# EAGLE board piezo-preamp-tickler_V0-4 (EAGLE 7.5.0)
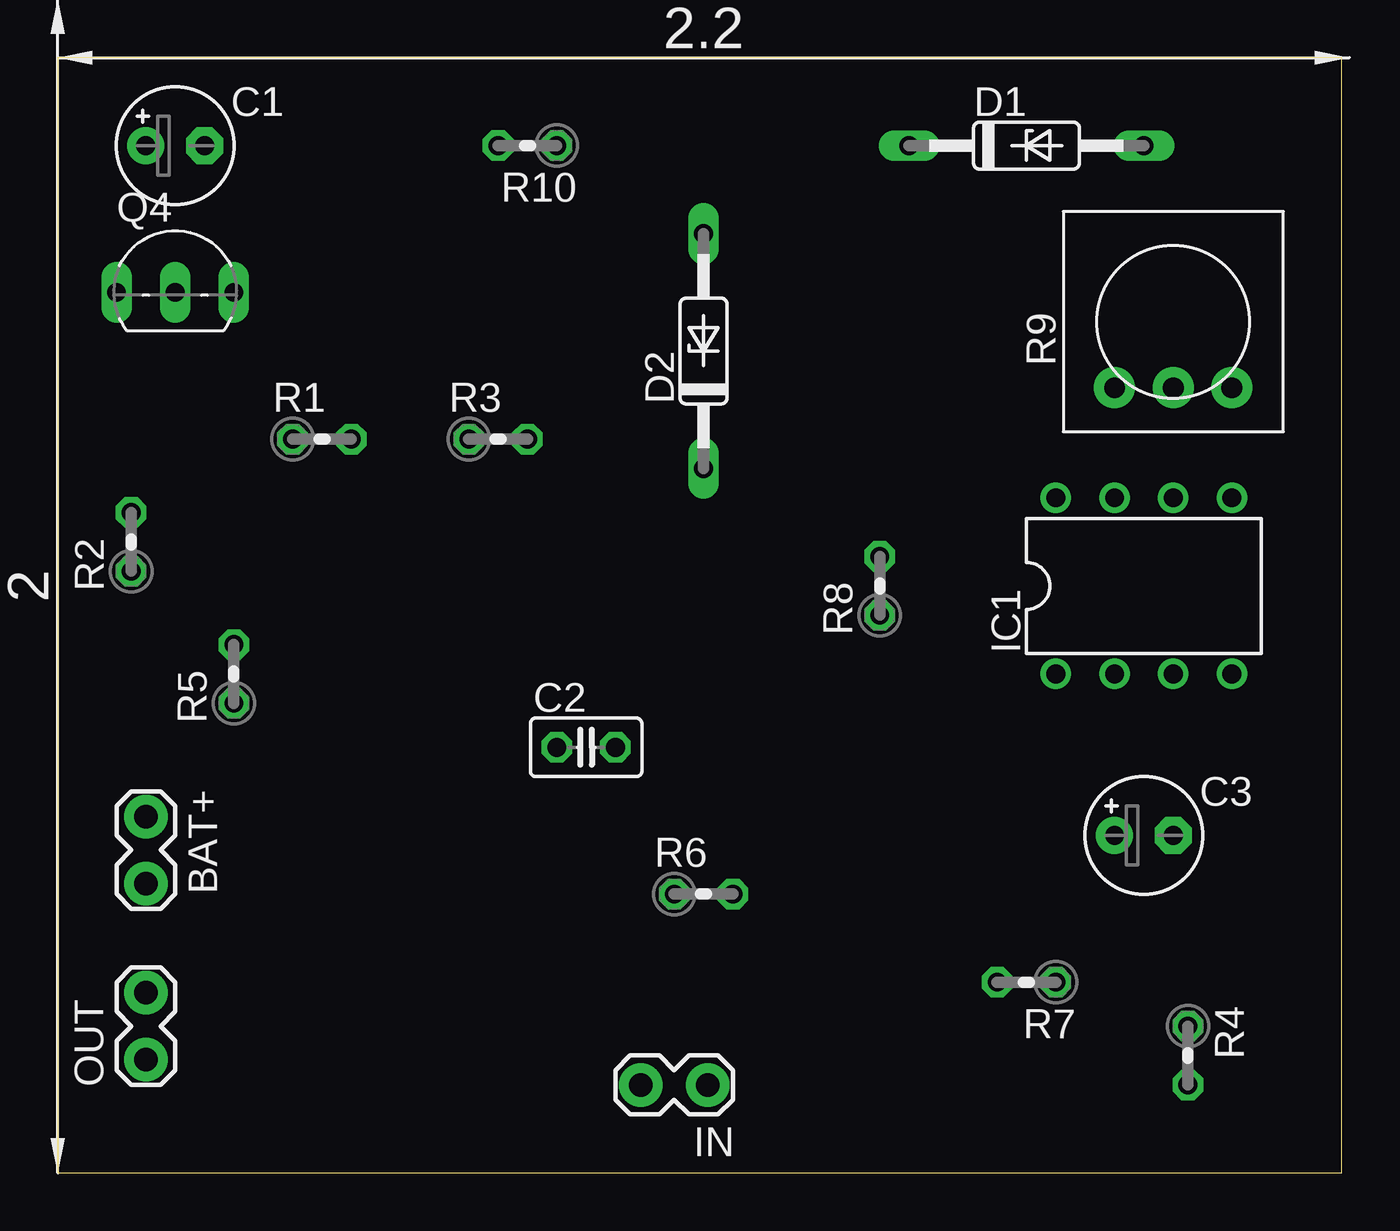
[diagram p0: board, top side]
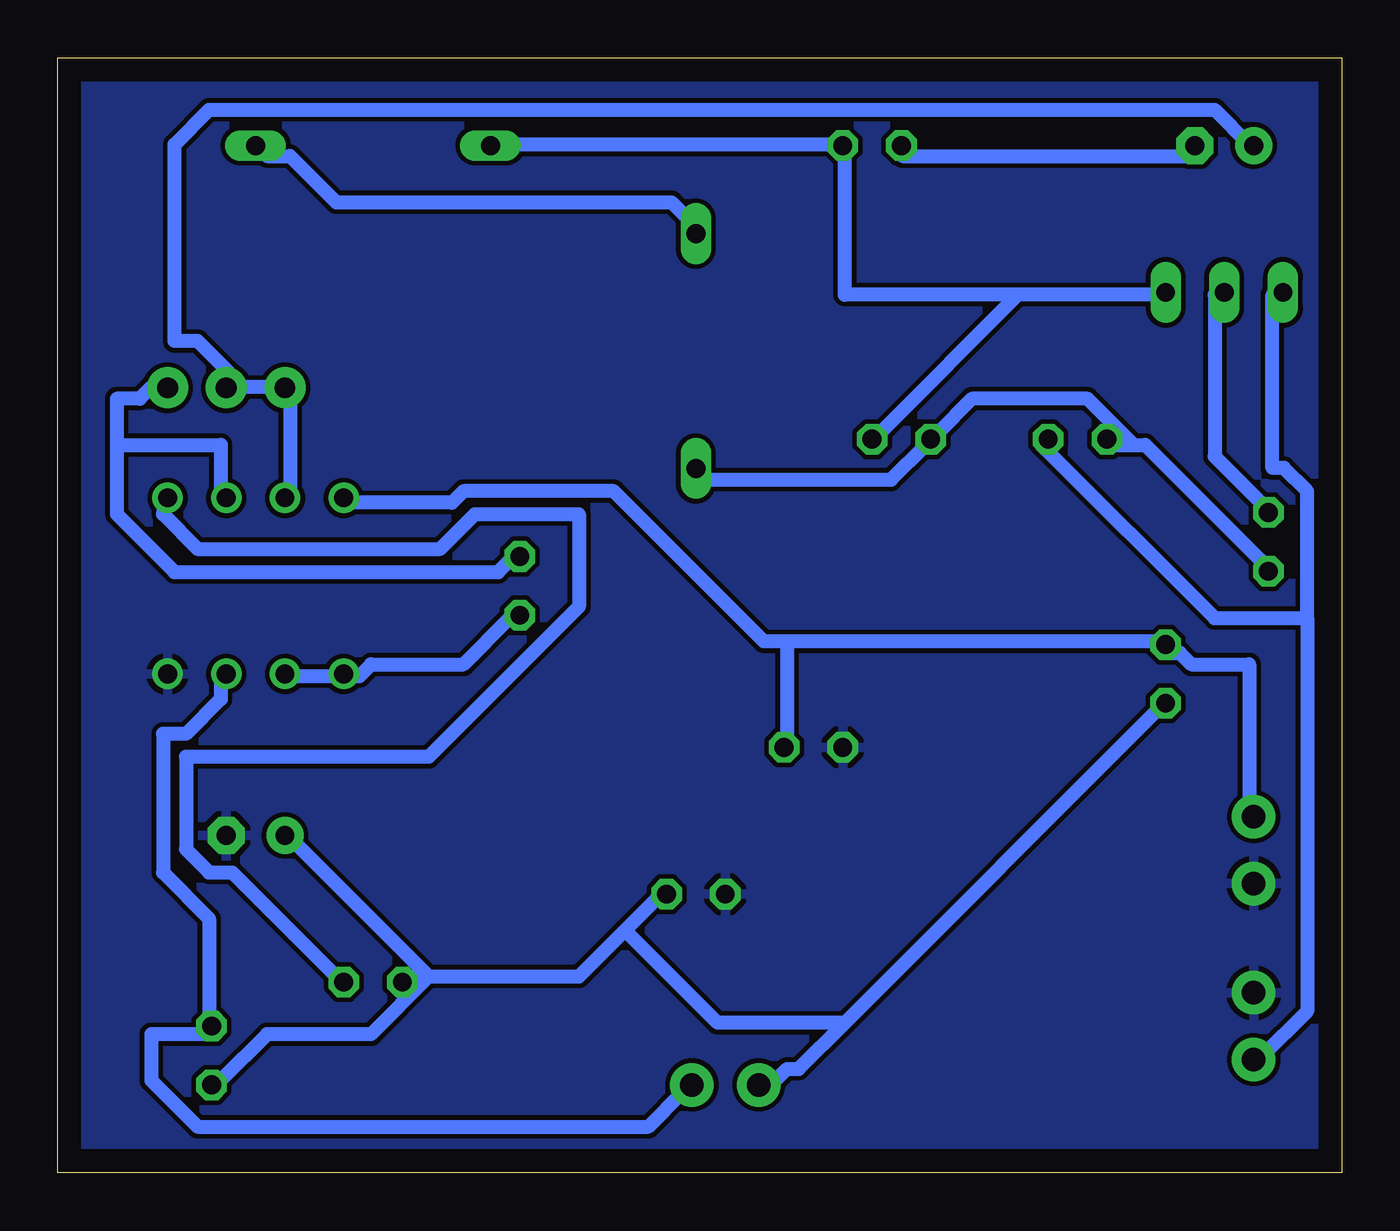
[diagram p1: board, bottom side, seen from below]

Size 55.55 x 48.25 mm. Coordinates in mm from the lower left corner, seen from the top.
Outline: 0,0 55.55,0 55.55,48.25 0,48.25 0,0
Copper layers (1*16): Top 0.035mm / dielectric 1.5mm / Bottom 0.035mm
Design rules "default *": minimum track width 10mil, minimum drill 24mil, track to track 8mil, track to pad 8mil, pad to pad 8mil, via to via 8mil, smd to smd 8mil, copper to edge 40mil, drill to drill 8mil, minimum pad ring 10mil, minimum via ring 8mil, stop-mask expansion 4mil, vias tented up to drill 0mil, thermal gap 10mil
Net classes: 0 default: width 0.6 mm, clearance 0.2 mm

## Footprints (pad centres in the part's own frame; a part is rotated, then mirrored left to right if it is on the bottom)
1X02_LOCK = drill 1.016 pad 1.88: 1 -0.178,0; 2 2.718,0
E2,5-5 = drill 0.813 pad 1.6: + -1.27,0 | drill 0.813 pad 1.6 octagon: - 1.27,0
C025-025X050 = drill 0.813 octagon: 1 -1.27,0; 2 1.27,0
DO35Z10 = drill 0.813 long: A 5.08,0; C -5.08,0
DIL08 = drill 0.813 pad 1.27: 1 -3.81,-3.81; 2 -1.27,-3.81; 3 1.27,-3.81; 4 3.81,-3.81; 5 3.81,3.81; 6 1.27,3.81; 7 -1.27,3.81; 8 -3.81,3.81
TO92- = drill 0.813 long: 1 2.54,0; 2 0,0; 3 -2.54,0
0204V = drill 0.813 octagon: 1 -1.27,0; 2 1.27,0
TRIM-3386 = drill 0.9 pad 1.778: 1 -2.54,-2.857; 2 0,-2.857; 3 2.54,-2.857

## Placement (x,y rotation side)
BAT+  [1X02_LOCK]  3.81,15.24 270 top
C1  10u  [E2,5-5]  5.08,44.45 0 top
C2  100n  [C025-025X050]  22.86,18.41 0 top
C3  10u  [E2,5-5]  46.99,14.61 0 top
D1  [DO35Z10]  41.91,44.45 0 top
D2  [DO35Z10]  27.94,35.56 90 top
IC1  TLC272  [DIL08]  46.99,25.4 0 top
IN  [1X02_LOCK]  27.94,3.81 180 top
OUT  [1X02_LOCK]  3.81,5.08 90 top
Q4  2N5484  [TO92-]  5.08,38.1 0 top
R1  10K  [0204V]  11.43,31.75 0 top
R2  1.2K  [0204V]  3.17,27.3 90 top
R3  1M  [0204V]  19.05,31.75 0 top
R4  10k..10m  [0204V]  48.9,5.08 270 top
R5  150K  [0204V]  7.62,21.59 90 top
R6  100K  [0204V]  27.94,12.06 0 top
R7  1K  [0204V]  41.91,8.26 180 top
R8  1K  [0204V]  35.56,25.4 90 top
R9  [TRIM-3386]  48.26,36.83 0 top
R10  1K  [0204V]  20.32,44.45 180 top

## Library data of the parts
BAT+ OUT = CMU-ArtFab
C1-C3 = rcl
D1 D2 = diode
IC1 = linear
IN = SparkFun-Connectors
Q4 = transistor-fet
R1-R8 R10 = resistor
R9 = adafruit

## Nets
GND: BAT+.2 C2.1 C3.- IC1.4 OUT.2 R6.1
N$1: D1.A D2.A
N$2: OUT.1 Q4.3 R1.2
N$3: Q4.2 R2.2
N$5: IC1.5 R7.1
N$6: C1.+ IC1.7 R9.1 R9.2
N$7: IC1.6 R8.2 R9.3
N$8: C3.+ IN.2 R4.2 R5.1 R6.2 R7.2
N$9: IC1.3 IN.1 R4.1
N$10: D1.C Q4.1 R3.2 R10.1
N$11: C1.- R10.2
N$14: IC1.1 IC1.2 R8.1
R3: D2.C R1.1 R2.1 R3.1
V9V: BAT+.1 C2.2 IC1.8 R5.2

## Tracks (layer width: path | path; a pad name or v marks a point on that pad's centre or on a via)
GND
  pour Bottom: 0,48.26 55.88,48.26 55.88,0 0,0
N$1
  Bottom 0.6: D2.A 28,41 29,42 43.5,42 45.5,44 46.5,44 D1.A
N$2
  Bottom 0.6: 1.5,24 1.5,29.5 2.5,30.5 3,30.5 3,38 Q4.3 | 1.5,24 5.5,24 13,31.5 R1.2 | 1.5,24 1.5,7 3.5,5 OUT.1
N$3
  Bottom 0.6: R2.2 3.5,29 5.5,31 5.5,38 Q4.2
N$5
  Bottom 0.6: R7.1 43.5,8.5 48,13 49,13 50,14 50,18 39.5,18 33,24.5 33,28.5 37.5,28.5 39,27 49.5,27 51,28.5 51,29 IC1.5
N$6
  Bottom 0.6: 47.5,34 49.5,36 50.5,36 50.5,44.5 49,46 5.5,46 4,44.5 C1.+ | 47.5,34 46,34 R9.1 45.5,33.5 45.5,29.5 IC1.7 | 47.5,34 48,34 R9.2
N$7
  Bottom 0.6: 53,31.5 53,33.5 52,33.5 51.5,34 51,34 R9.3 | 53,31.5 53,28.5 50.5,26 36.5,26 36,26.5 R8.2 | 53,31.5 48.5,31.5 48.5,29.5 IC1.6
N$8
  Bottom 0.6: 31,10.5 33,8.5 39.5,8.5 | 31,10.5 29.5,12 R6.2 | 39.5,8.5 40.5,8.5 R7.2 | 39.5,8.5 42,6 46.5,6 48.5,4 R4.2 | 39.5,8.5 45.5,14.5 C3.+ | 21.5,6.5 23.5,4.5 24,4.5 24.5,4 25,4 IN.2 | 21.5,6.5 8,20 R5.1 | 31,10.5 27,6.5 21.5,6.5
N$9
  Bottom 0.6: IC1.3 48.5,21.5 48.5,20.5 50,19 51,19 51,13 49,11 49,6.5 R4.1 49,6 51.5,6 51.5,4 49.5,2 30,2 28.5,3.5 IN.1
N$10
  Bottom 0.6: 14,38 20,32 R3.2 | 14,38 8,38 Q4.1 | 14,38 21.5,38 21.5,44 R10.1 22,44.5 36.5,44.5 D1.C
N$11
  Bottom 0.6: C1.- 6.5,44 19,44 R10.2
N$14
  Bottom 0.6: IC1.2 45.5,21.5 43.5,21.5 IC1.1 43,21.5 42.5,21.5 42,22 38,22 36,24 R8.1
R3
  Bottom 0.6: D2.C 27.5,30 19.5,30 18,31.5 R3.1 17.5,32 16,33.5 11,33.5 9,31.5 | 9,31.5 10,31.5 R1.1 | 9,31.5 8.5,31.5 3.5,26.5 R2.1
V9V
  Bottom 0.6: 24,23 24,18.5 C2.2 | 24,23 8,23 R5.2 7.5,22.5 7,22.5 6.5,22 4,22 4,15.5 BAT+.1 | 24,23 25,23 31.5,29.5 38,29.5 38.5,29 43,29 IC1.8